# Altium PCB BOARD.PcbDoc
Units mm, origin at the board's own origin, x right, y up, seen from the top; angles counter-clockwise.
Board outline 100 x 100 mm, 4 copper layers (Top Layer, GND, VCC, Bottom Layer), stack 0.971 mm thick; 13 components, 13 nets, 45 pads, 0 vias.
Unrouted connection lines stored in the file: 23.
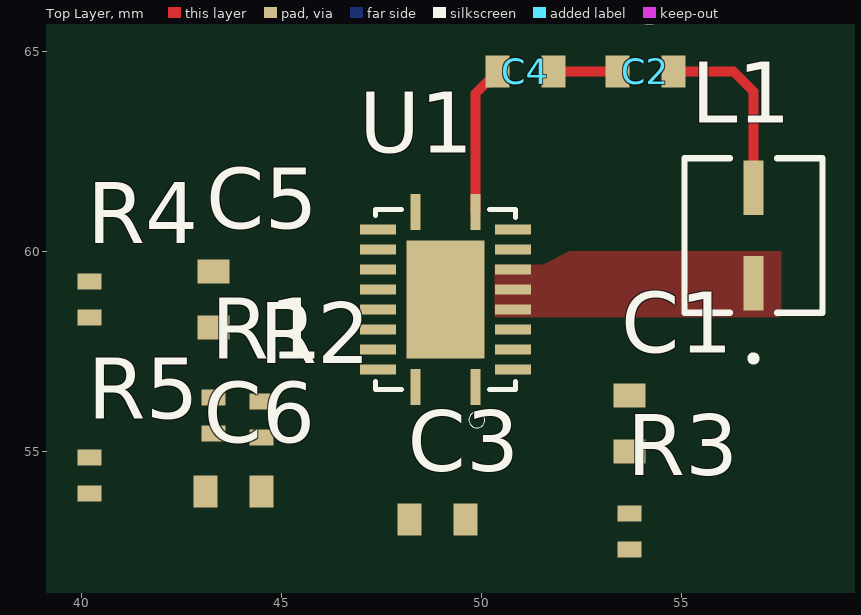
[diagram p0: Top Layer view]
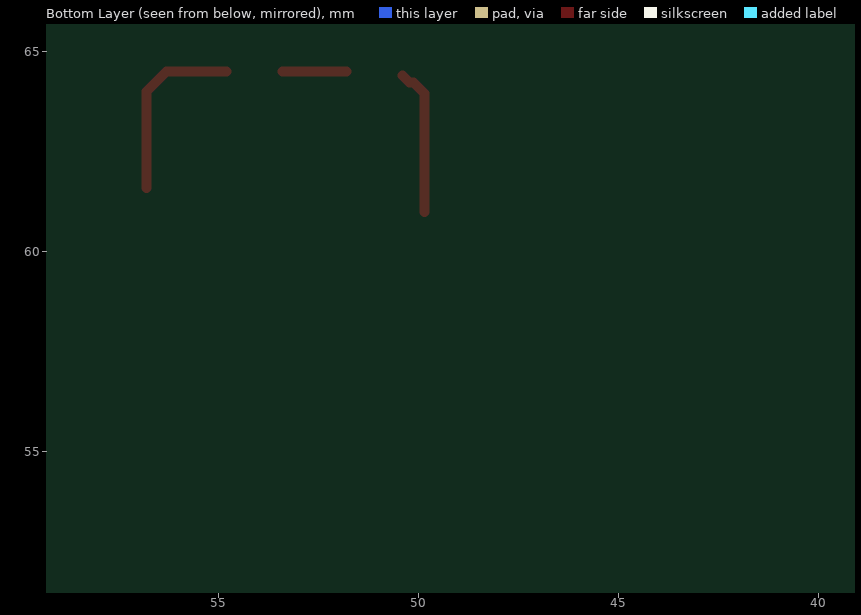
[diagram p1: Bottom Layer view, seen from below]

## Layer stack, top to bottom
Top Solder: solder mask 0.0102, Solder Resist, Dk 3.5
Top Layer: signal copper 0.0356
Dielectric 1: dielectric 0.32, FR-4, Dk 4.8
GND: signal copper 0.036
Dielectric 2: dielectric 0.254, Dk 4.2
VCC: signal copper 0.036
Dielectric 3: dielectric 0.254, Dk 4.2
Bottom Layer: signal copper 0.0356
Bottom Solder: solder mask 0.0102, Solder Resist, Dk 3.5

## Board outline
0,0 0,100 100,100 100,0

## Design rules (kind name [scope] priority, off if disabled: settings)
AcuteAngle [All] p1: minimum=6.00000000000000E+0001 checktracksonly=FALSE
Clearance Clearance_1 [All] p1: gap=0.254 ignorepadtopadclearanceinfootprint=FALSE except(0: Arc-Hole Track-Hole SMDPad-Hole THPad-Hole Via-Hole Fill-Hole Poly-Hole Region-Hole Text-Hole)
Clearance Clearance_HV [InNetClass('HV') vs InNetClass('HV')] p2: gap=1.2 ignorepadtopadclearanceinfootprint=TRUE
Clearance Clearance_Diff_Poly [InDifferentialPairClass('USB_90OHM') and IsTrack vs Not InDifferentialPairClass('USB_90OHM')] p3: gap=0.2 ignorepadtopadclearanceinfootprint=FALSE except(0: Arc-Hole Track-Hole SMDPad-Hole THPad-Hole Via-Hole Fill-Hole Poly-Hole Region-Hole Text-Hole)
Clearance [All] p4: gap=0.15 ignorepadtopadclearanceinfootprint=TRUE
ComponentClearance [All] p1: gap=0.125 collisioncheckmode=3 verticalgap=0.25 showdistances=FALSE
DiffPairsRouting DiffPairsRouting_90 [InDifferentialPairClass('USB_90OHM')] p1: maxlimit=1 minlimit=0.2 mostfreqgap=0.5 toplayer_minwidth=0.15 toplayer_maxwidth=0.3 toplayer_prefwidth=0.3 midlayer1_mingap=0.254 midlayer1_maxgap=0.254 midlayer1_prefgap=0.254 midlayer1_minwidth=0.381 midlayer1_maxwidth=0.381 midlayer1_prefwidth=0.381 midlayer2_mingap=0.254 midlayer2_maxgap=0.254 midlayer2_prefgap=0.254 midlayer2_minwidth=0.381 midlayer2_maxwidth=0.381 midlayer2_prefwidth=0.381 bottomlayer_mingap=0.5 bottomlayer_minwidth=0.15 bottomlayer_maxwidth=0.3 bottomlayer_prefwidth=0.3 maxuncoupledlength=12.7
FabricationTestPointUsage TestPointUsage [All] p1: valid=0 allowmultiple=FALSE
FabricationTestpoint Testpoint [All] p1: side=3 testpointundercomponent=TRUE minsize=1.016 maxsize=2.54 preferedsize=1.524 minholesize=0.508 maxholesize=1.016 preferedholesize=0.813 testpointgrid=0.025 allowsidetop=TRUE allowsidebottom=TRUE usegrid=TRUE gridtolerance=0
HoleSize [All] p1: absolutevalues=TRUE maxlimit=10 minlimit=0 maxpercent=80.000 minpercent=20.000
HoleToHoleClearance HoleToHoleClearance_uVia [(AsMM(HoleDiameter) = 0.15) vs (AsMM(HoleDiameter) = 0.15)] p1: gap=0.25 allowstackedmicrovias=TRUE
HoleToHoleClearance HoleToHoleClearance_StandardVia [All] p2: gap=0.254 allowstackedmicrovias=TRUE
MinimumSolderMaskSliver [All] p1 off: minsoldermaskwidth=0.254
PlaneClearance PlaneClearance_Via [IsVia] p1: clearance=0.127
PlaneClearance PlaneClearance_2700 [(AsMM(HoleDiameter) = 2.7)] p2: clearance=1.4
PlaneClearance PlaneClearance_NPTH [IsPad And (PadIsPlated = 'false') And (HoleSize <> 0)] p3: clearance=0.635
PlaneClearance [All] p4: clearance=0.25
PlaneConnect PlaneConnect_Direct [Isvia] p1: planeconnectstyle=Direct reliefexpansion=0.508 reliefentries=4 reliefconductorwidth=0.254 reliefairgap=0.254
PlaneConnect [All] p2: planeconnectstyle=Relief reliefexpansion=0.15 reliefentries=4 reliefconductorwidth=0.5 reliefairgap=0.2
PolygonConnect PolyCon_Large_Pads [All vs IsVia And (AsMils(HoleDiameter) = 70)] p1: connectstyle=Relief reliefconductorwidth=2 reliefentries=4 polygonreliefangle="90 Angle" airgapwidth=0.381
PolygonConnect PolyCon_Relief [All vs IsVia OR InComponentClass('Poly_Relief_Connect')] p2: connectstyle=Relief reliefconductorwidth=0.254 reliefentries=4 polygonreliefangle="90 Angle" airgapwidth=0.254
PolygonConnect PolyCon [All] p3: connectstyle=Direct reliefconductorwidth=0.25 reliefentries=4 polygonreliefangle="90 Angle" airgapwidth=0.254
RoutingVias [All] p1: holewidth=0.25 width=0.45 viastyle="Through Hole" minholewidth=0.2 minwidth=0.4 maxholewidth=1.8 maxwidth=3
SMDToCorner [All] p1 off: distance=39370
SilkToSilkClearance [All] p1 off: silktosilkclearance=0.025
SilkToSolderMaskClearance SilkscreenOverComponentPads [IsPad] p1 off: minsilkscreentomaskgap=0.025 clearancetoexposedcopper=TRUE
SolderMaskExpansion SolderMaskExpansion_VIA [IsVia] p1: expansion=0.102
SolderMaskExpansion SolderMaskExpansion_NPTH [(Layer = 'MultiLayer') And (PadIsPlated = 'False')] p2: expansion=0.254 soldermaskfromhole=TRUE
SolderMaskExpansion SolderMaskExpansion_NT [HasFootprint('NT2_475_200')] p3: expansion=-0.75
UnRoutedNet [All] p1: checkbadconnections=TRUE
ViasUnderSMD ViasUnder_uSMD [InComponentClass('uVia_in_pad')] p1: allowed=TRUE
ViasUnderSMD ViasUnder_SMD [All] p2: allowed=FALSE
Width [All] p1: maxlimit=5 minlimit=0.075 preferedwidth=0.2 toplayer_minwidth=0.15 toplayer_maxwidth=2 midlayer1_prefwidth=0.075 midlayer2_minwidth=0.1 midlayer2_maxwidth=2 bottomlayer_minwidth=0.15 bottomlayer_maxwidth=2 minimp=50.000000 maximp=50.000000 favimp=50.000000
18 further rules are at their usual default settings.

## Components (designator, comment, footprint, x,y, rotation, side; value= is the part's Value field where it differs from the comment)
C1 "0603" CAP0603R 53.7,55.7 r270 top value=Value
C2 "0603" CAP0603R 54.1,64.5 r180 top value=Value
C3 "0603" CAP0603R 48.9,53.3 r0 top value=Value
C4 "0603" CAP0603R 51.1,64.5 r180 top value=Value
C5 "0603" CAP0603R 43.3,58.8 r90 top value=Value
C6 "0603" CAP0603R 43.8,54 r0 top value=Value
L1 "IHLP-1212BZ" IHLP-1212BZ 56.8,60.4 r90 top
R1 "0402" RES0402R 43.3,55.9 r90 top value=Value
R2 "0402" RES0402R 44.5,55.8 r90 top value=Value
R3 "0402" RES0402R 53.7,53 r90 top value=Value
R4 "0402" RES0402R 40.2,58.8 r90 top value=Value
R5 "0402" RES0402R 40.2,54.4 r90 top value=Value
U1 "TPS61088" QFN50P450X350X100-21N 49.1,58.8 r180 top

## Footprints (in the part's own frame and the unit in brackets; to place one, negate y for a bottom-side part, rotate by r counter-clockwise, add the part's x,y. Pads: shape width x height; smd on the part's side, far side on the other; paste and mask are expansions set on the pad)
CAP0603R [mm] "capacitor 0603 reflow soldering"
  rect 0.6x0.8 smd mask+0: 1(-0.7,0) 2(0.7,0)
  body extent -0.8,-0.4 0.8,0.4, height 0.3
IHLP-1212BZ [mil]
  rect 54x20 smd paste+0 mask+0: 1(-47,0) 2(47,0)
  silkscreen extent -124,-68 76,68, body extent -130,-63 71,63, height 81
QFN50P450X350X100-21N [mm]
  rect 0.26x0.9 smd: 1(-0.75,2.185) 10(-0.75,-2.185) 11(0.75,-2.185) 20(0.75,2.185)
  rect 0.9x0.26 smd: 2(-1.685,1.75) 3(-1.685,1.25) 4(-1.685,0.75) 5(-1.685,0.25) 6(-1.685,-0.25) 7(-1.685,-0.75) 8(-1.685,-1.25) 9(-1.685,-1.75) 12(1.685,-1.75) 13(1.685,-1.25) 14(1.685,-0.75) 15(1.685,-0.25) 16(1.685,0.25) 17(1.685,0.75) 18(1.685,1.25) 19(1.685,1.75)
  rect 1.95x2.95 smd: 21(0,0)
  silkscreen extent -1.75,-2.25 1.75,3.21, body extent -1.75,-2.25 1.75,2.25, height 1
RES0402R [mm] "resistor 0402 reflow soldering"
  rect 0.4x0.6 smd mask+0: 1(-0.45,0) 2(0.45,0)
  body extent -0.5,-0.25 0.5,0.25, height 0.3

## Part data
C1 C2 C3 C4 C5 C6: library part CAP0603, "0603 capacitor"
L1: library part IND_IHLP-1212BZ, "1µH Shielded Molded Inductor 5A 24mOhm Max Nonstandard", Case/Package=1212, Case Code (Metric)=3630, Current Rating=5A, DC Resistance (DCR)=24mR, Inductance=1uH, Inductance Tolerance=20%, Manufacturer="Vishay Dale", Manufacturer Part Number=IHLP1212BZER1R0M11, Max Operating Temperature=125°C, Min Operating Temperature=-55°C, Package Quantity=3000, Saturation Current=4.5A, Self Resonant Frequency=75MHz, Supplier Part Number 1=541-1319-1-ND, Test Frequency=100kHz, Case Code (Imperial)=1212, ComponentLink1Description=http://www.mouser.com/ds/2/427/lp12bz11-244380.pdf?src-supplier=Mouser, ComponentLink1URL=http://www.mouser.com/ds/2/427/lp12bz11-244380.pdf?src-supplier=Mouser, ComponentLink2Description=http://www.vishay.com/docs/34289/lp12bz11.pdf?src-supplier=Digi-Key, ComponentLink2URL=http://www.vishay.com/docs/34289/lp12bz11.pdf?src-supplier=Digi-Key, ComponentLink3Description=http://www.vishay.com/docs/34289/lp12bz11.pdf?src-supplier=Avnet, ComponentLink3URL=http://www.vishay.com/docs/34289/lp12bz11.pdf?src-supplier=Avnet, ComponentLink4Description=http://www.farnell.com/datasheets/652599.pdf?src-supplier=Element14, ComponentLink4URL=http://www.farnell.com/datasheets/652599.pdf?src-supplier=Element14, ComponentLink5Description=http://www.vishay.com/docs/34289/lp12bz11.pdf?src-supplier=Avnet+Europe, ComponentLink5URL=http://www.vishay.com/docs/34289/lp12bz11.pdf?src-supplier=Avnet+Europe, ComponentLink6Description=https://www.verical.com/server-webapp/html/getDatasheet?partID=180380&src-supplier=Verical, ComponentLink6URL=https://www.verical.com/server-webapp/html/getDatasheet?partID=180380&src-supplier=Verical, Contact Plating=Tin, Core Material=Metal,Composite, Depth=3.2mm, Height=2mm, Height - Seated (Max)=0.079inch, Lead Free="Lead Free", Length=3.6mm, Max DC Current=5A, Military Standard=Not, Mount="Surface Mount", Number of Pins=2, Packaging="Tape and Reel", Pricing 1="1=1.45, 10=1.346, 100=0.9729, 500=0.7452, 1000=0.6624 (USD)", Radiation Hardening=No, REACH SVHC=Unknown, RMS Current (Irms)=5A, Shielding=Shielded, Stock 1=196362, Supplier 1=Digi-Key, Termination=SMD/SMT, Tolerance=20%, Width=0.118inch
R1 R2 R3 R4 R5: library part RES0402, "0402 resistor"
U1: "Boost converter", Supplier Part Number 1=296-42129-1-ND, Supplier 1=Digi-Key

## Nets (pads, with @x,y where several pads share a name; then routed paths per layer and width w, separated by ;. In a path a pad name is that pad's centre, name@x,y a point inside that pad or via, vN(x,y) a via of type N, cw(c..) or ccw(c..) an arc to the next point about the centre after c; other vN are vias at no path point)
BOOT_C: C1.2 L1.1 R3.2 U1.4 U1.5 U1.6 U1.7
GND: C2.2 C3.1 C4.1 C5.1 C6.1 R1.1 R5.1 U1.20 U1.21 | length 1.6
  Top Layer w0.254: C4.1 C2.2
INPUT: C2.1 L1.2 U1.9 | length 4.6
  Top Layer w0.254: C2.1 56.3,64.5 56.8,64 L1.2
NetC1_1: C1.1 U1.8
NetC3_2: C3.2 U1.1
NetC4_2: C4.2 U1.10 | length 3.7
  Top Layer w0.254: U1.10 49.85,63.95 50.127,64.227 50.227,64.227 C4.2@50.4,64.4
NetC5_2: C5.2 R4.2 U1.14 U1.15 U1.16
NetC6_2: C6.2 R2.1
NetR1_2: R1.2 U1.19
NetR2_2: R2.2 U1.18
NetR3_1: R3.1 U1.3
NetR4_1: R4.1 R5.2 U1.17
NetU1_2: U1.2
pads on no net: U1.11 U1.12 U1.13

## Polygon pours and split planes (outlines as drawn)
BOOT_C on Top Layer "NONET_L01_P-001" (solid, remove dead copper, pour order 2): 50.227,59.8 50.227,58.35 57.45,58.35 57.5,58.4 57.5,60 52.2,60 51.8,59.8 51.554,59.677